# EAGLE board STMsch (EAGLE 9.5.2)
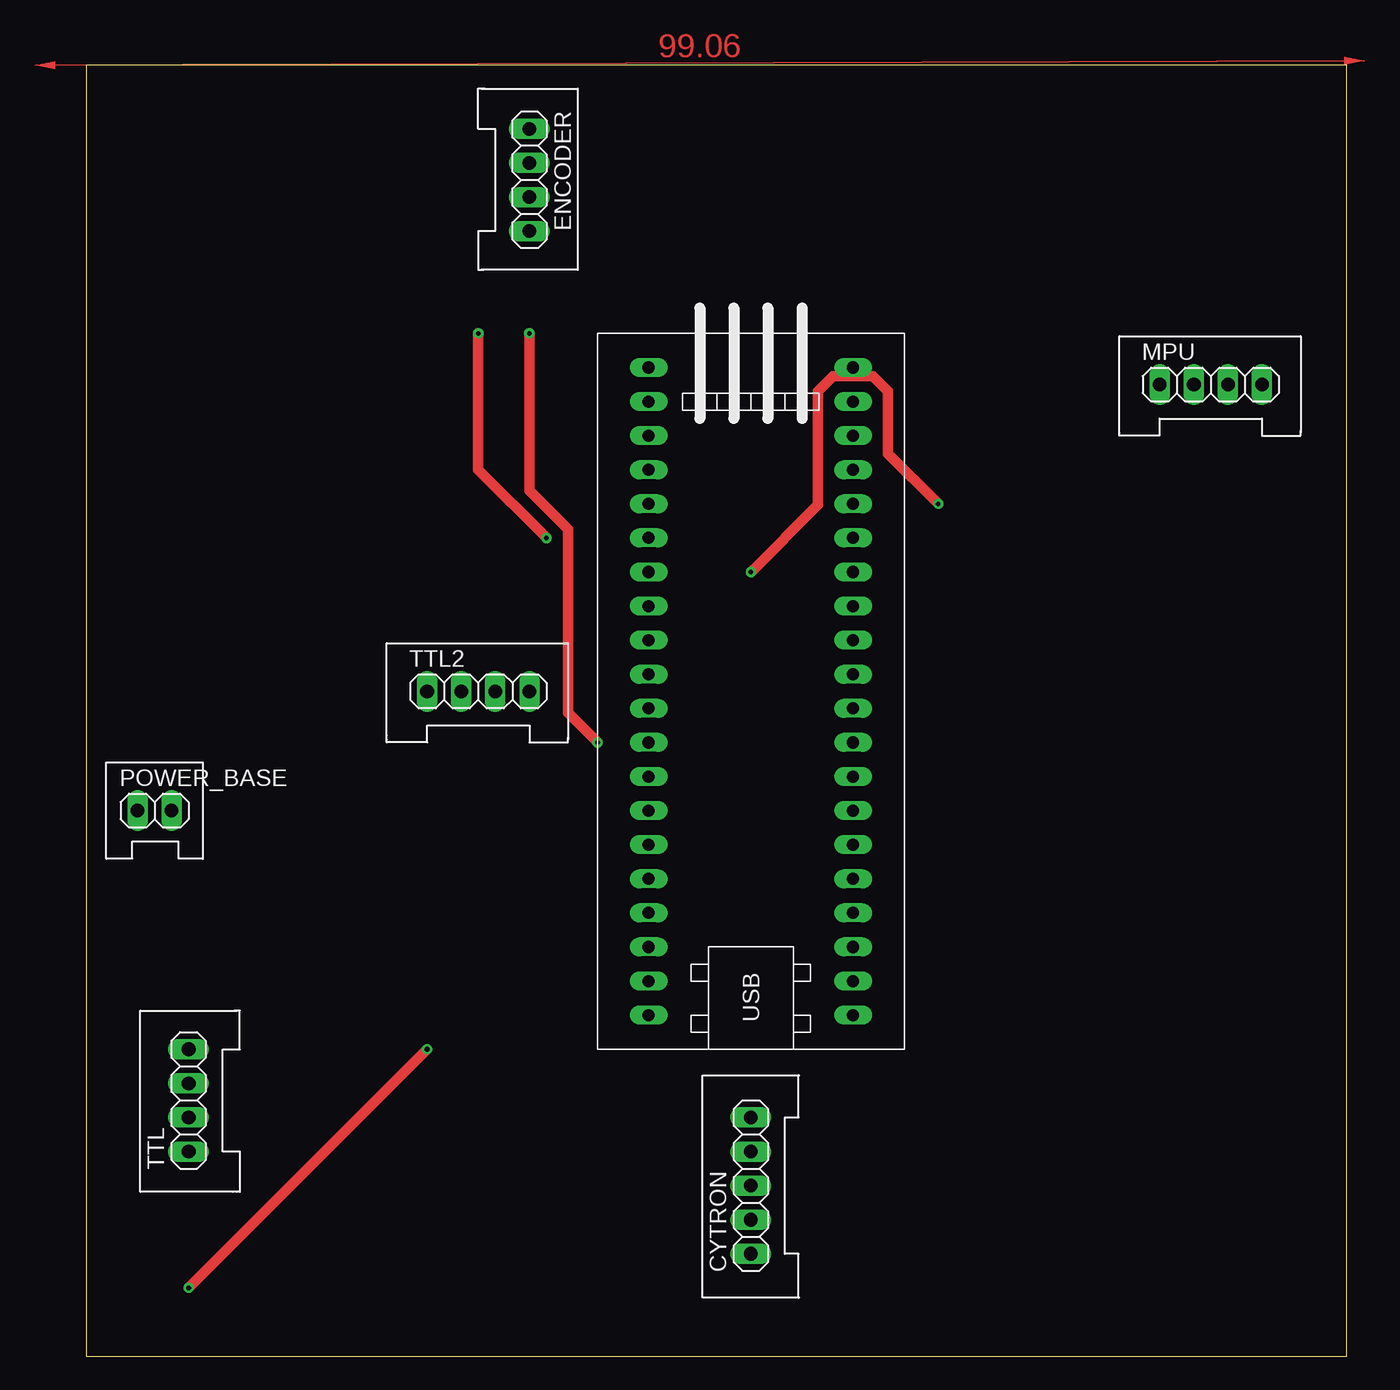
[diagram p0: board, top side]
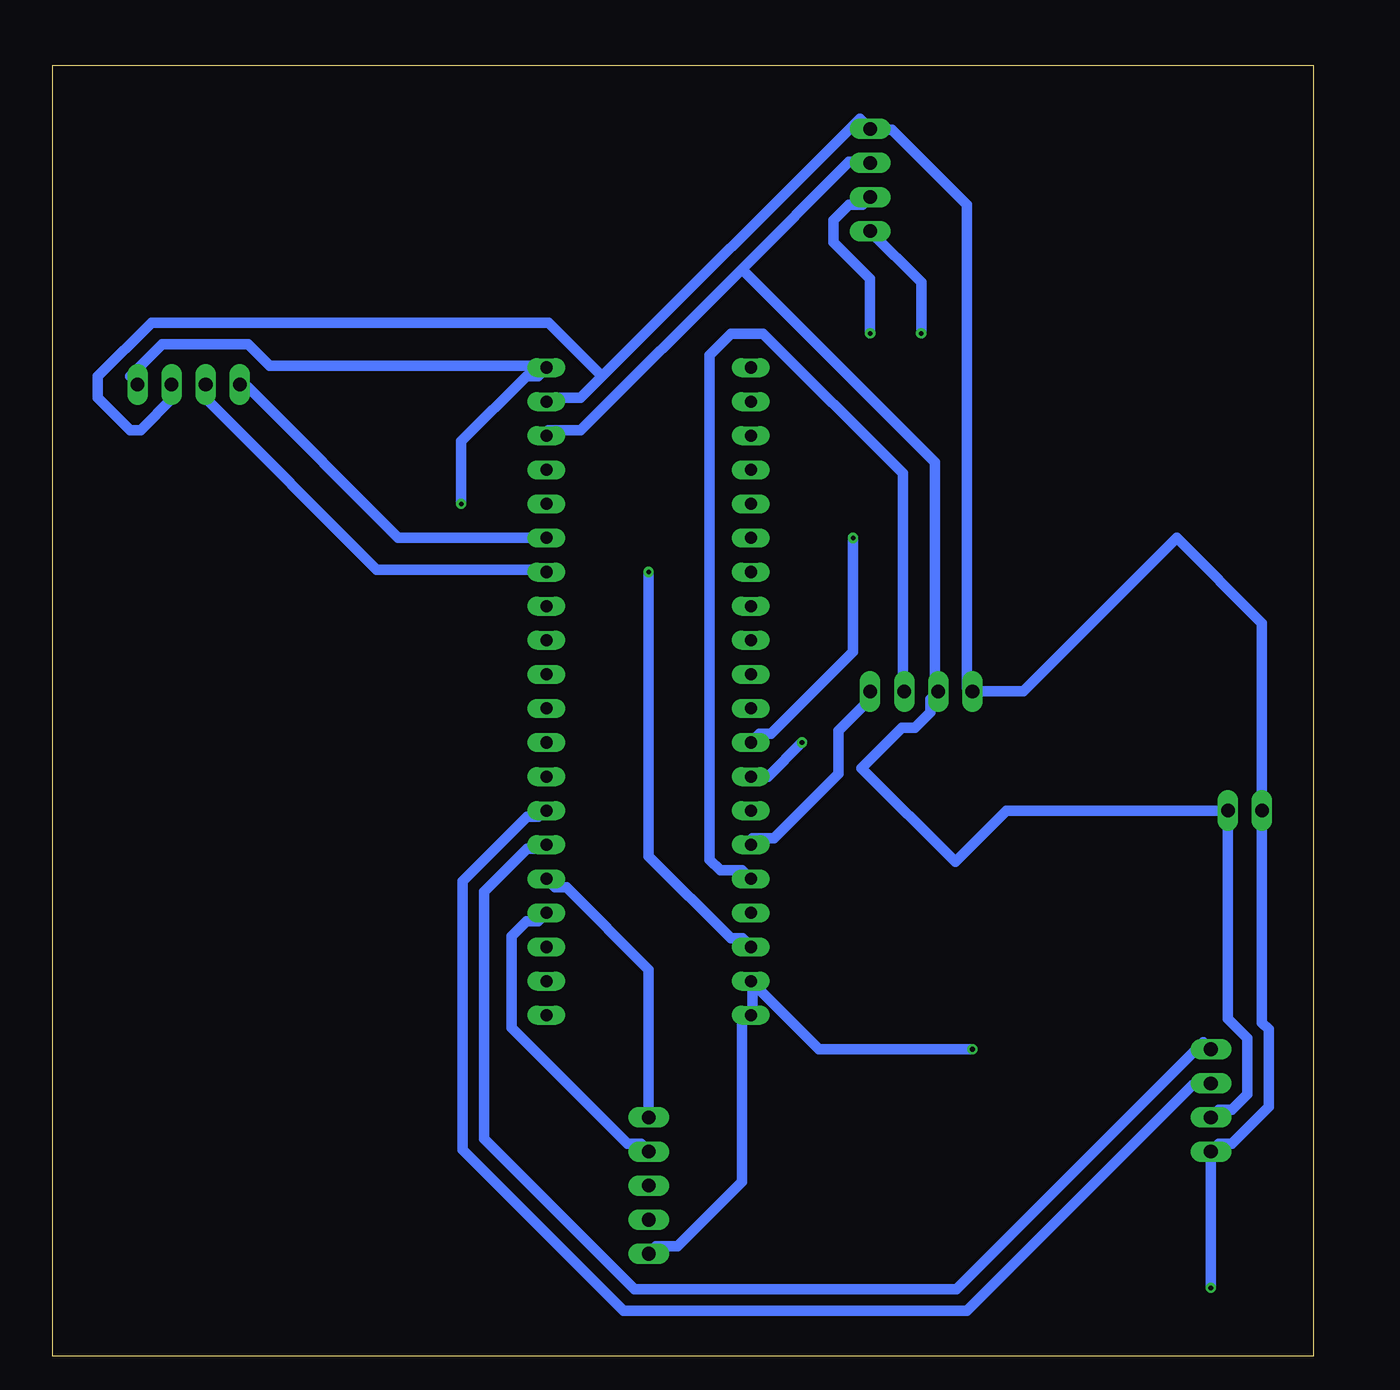
[diagram p1: board, bottom side, seen from below]

Size 93.96 x 96.19 mm. Coordinates in mm from the lower left corner, seen from the top.
Outline: 0,0 93.96,0 93.96,96.19 0,96.19 0,0
Copper layers (1*16): Top 0.035mm / dielectric 1.5mm / Bottom 0.035mm
Design rules "default *": minimum track width 0.8mm, minimum drill 0.35mm, track to track 0.8mm, track to pad 0.8mm, pad to pad 0.8mm, via to via 0.8mm, smd to smd 6mil, copper to edge 0.8mm, drill to drill 0.8mm, minimum pad ring 10mil, minimum via ring 8mil, stop-mask expansion 4mil, vias tented up to drill 0mil, thermal gap 10mil

## Footprints (pad centres in the part's own frame; a part is rotated, then mirrored left to right if it is on the bottom)
1X05_DATA = drill 1.016 long: 1 -5.08,0; 2 -2.54,0; 3 0,0; 4 2.54,0; 5 5.08,0
1X04_DATA = drill 1.016 long: 1 -3.81,0; 2 -1.27,0; 3 1.27,0; 4 3.81,0
1X02_DATA = drill 1.016 long: 1 -1.27,0; 2 1.27,0
STM32F103C8T6-MODULE = drill 0.9 long: 3.3V_1 25.4,-7.62; 3.3V_2 -17.78,7.62; 5V 20.32,-7.62; GND_1 22.86,-7.62; GND_2 -20.32,7.62; GND_3 -22.86,7.62; PA_0 15.24,7.62; PA_1 12.7,7.62; PA_2 10.16,7.62; PA_3 7.62,7.62; PA_4 5.08,7.62; PA_5 2.54,7.62; PA_6 0,7.62; PA_7 -2.54,7.62; PA_8 -12.7,-7.62; PA_9 -10.16,-7.62; PA_10 -7.62,-7.62; PA_11 -5.08,-7.62; PA_12 -2.54,-7.62; PA_15 0,-7.62; PB_0 -5.08,7.62; PB_1 -7.62,7.62; PB_3 2.54,-7.62; PB_4 5.08,-7.62; PB_5 7.62,-7.62; PB_6 10.16,-7.62; PB_7 12.7,-7.62; PB_8 15.24,-7.62; PB_9 17.78,-7.62; PB_10 -10.16,7.62; PB_11 -12.7,7.62; PB_12 -22.86,-7.62; PB_13 -20.32,-7.62; PB_14 -17.78,-7.62; PB_15 -15.24,-7.62; PC_13 22.86,7.62; PC_14 20.32,7.62; PC_15 17.78,7.62; RESET -15.24,7.62; VB 25.4,7.62

## Placement (x,y rotation side)
CYTRON  [1X05_DATA]  49.53,12.7 90 top
ENCODER  [1X04_DATA]  33.02,87.63 270 top
MPU  [1X04_DATA]  83.82,72.39 0 top
POWER_BASE  [1X02_DATA]  5.08,40.64 0 top
TTL  [1X04_DATA]  7.62,19.05 90 top
TTL2  [1X04_DATA]  29.21,49.53 0 top
U$1  STM32F103C8T6-MODULE  [STM32F103C8T6-MODULE]  49.53,48.26 90 top

## Library data of the parts
CYTRON ENCODER MPU POWER_BASE TTL TTL2 U$1 = MIA_LIBRARY-2-2-2

## Nets
3.3V: MPU.4 U$1.3.3V_1 U$1.3.3V_2
5V: ENCODER.2 POWER_BASE.2 TTL2.2 TTL.2 U$1.5V
GND: CYTRON.1 ENCODER.1 MPU.3 POWER_BASE.1 TTL2.1 TTL.1 U$1.GND_1 U$1.GND_2 U$1.GND_3
PA_0: U$1.PA_0
PA_1: U$1.PA_1
PA_2: U$1.PA_2
PA_3: U$1.PA_3
PA_4: U$1.PA_4
PA_5: U$1.PA_5
PA_6: U$1.PA_6
PA_7: ENCODER.4 U$1.PA_7
PA_8: CYTRON.5 U$1.PA_8
PA_9: TTL.4 U$1.PA_9
PA_10: TTL.3 U$1.PA_10
PA_11: U$1.PA_11
PA_12: U$1.PA_12
PA_15: U$1.PA_15
PB_0: ENCODER.3 U$1.PB_0
PB_1: U$1.PB_1
PB_3: U$1.PB_3
PB_4: U$1.PB_4
PB_5: U$1.PB_5
PB_6: MPU.2 U$1.PB_6
PB_7: MPU.1 U$1.PB_7
PB_8: U$1.PB_8
PB_9: U$1.PB_9
PB_10: TTL2.4 U$1.PB_10
PB_11: TTL2.3 U$1.PB_11
PB_12: U$1.PB_12
PB_13: U$1.PB_13
PB_14: U$1.PB_14
PB_15: CYTRON.4 U$1.PB_15
PC_13: U$1.PC_13
PC_14: U$1.PC_14
PC_15: U$1.PC_15
RESET: U$1.RESET
VB: U$1.VB

## Tracks (layer width: path | path; a pad name or v marks a point on that pad's centre or on a via)
3.3V  (via drill 0.35)
  Top 0.8: v49.53,58.42 54.54,63.43 54.54,71.91 55.66,73.02 58.64,73.02 59.76,71.91 59.76,67.24 v63.5,63.5
  Bottom 0.8: MPU.4 88.19,72.99 85.79,75.39 79.39,75.39 77.79,73.79 57.79,73.79 U$1.3.3V_1 57.79,73.02 58.64,73.02 63.5,68.17 v63.5,63.5 | U$1.3.3V_2 42.55,31.12 43.4,31.12 49.53,37.24 v49.53,58.42
5V
  Bottom 0.8: TTL.2 7.04,18.36 6.04,18.36 4.9,19.51 4.9,23.67 6.35,25.13 POWER_BASE.2 22.86,40.64 26.67,36.83 33.66,43.81 30.66,46.81 29.67,46.81 28.52,47.95 28.52,48.95 TTL2.2 28.19,49.79 28.19,66.59 42.59,80.99 | 42.59,80.99 34.59,88.99 33.79,88.99 ENCODER.2 | 42.59,80.99 54.59,68.99 56.99,68.99 U$1.5V
GND  (via drill 0.35)
  Top 0.8: v25.4,22.86 v7.62,5.08
  Bottom 0.8: 52.99,72.99 33.79,92.19 ENCODER.1 32.99,91.39 31.39,91.39 25.79,85.79 25.79,49.79 TTL2.1 21.59,49.53 10.16,60.96 3.81,54.61 POWER_BASE.1 3.81,24.85 3.3,24.34 3.3,18.57 6.04,15.82 7.04,15.82 TTL.1 v7.62,5.08 | 52.99,72.99 54.59,71.39 56.99,71.39 U$1.GND_1 | 52.99,72.99 56.99,76.99 86.59,76.99 90.59,72.99 90.59,71.39 88.19,68.99 87.39,68.99 84.99,71.39 84.99,72.19 MPU.3 | CYTRON.1 48.99,8.19 47.39,8.19 42.59,12.99 42.59,24.99 U$1.GND_3 41.79,25.79 41.79,27.39 U$1.GND_2 36.83,22.86 v25.4,22.86
PA_7  (via drill 0.35)
  Top 0.8: v34.29,60.96 29.21,66.04 v29.21,76.2
  Bottom 0.8: U$1.PA_7 41.27,46.36 40.42,46.36 34.29,52.48 v34.29,60.96 | ENCODER.4 29.21,80.01 v29.21,76.2
PA_8
  Bottom 0.8: U$1.PA_8 56.51,34.92 55.66,34.92 49.53,28.8 CYTRON.5
PA_9
  Bottom 0.8: U$1.PA_9 57.79,37.79 58.59,37.79 61.79,34.59 61.79,16.19 50.59,4.99 26.59,4.99 8.19,23.39 TTL.4
PA_10
  Bottom 0.8: U$1.PA_10 57.79,40.19 58.59,40.19 63.39,35.39 63.39,15.39 51.39,3.39 25.79,3.39 8.99,20.19 8.19,20.19 TTL.3
PB_0  (via drill 0.35)
  Top 0.8: v33.02,76.2 33.02,64.49 35.89,61.62 35.89,47.93 v38.1,45.72
  Bottom 0.8: U$1.PB_0 40.64,43.18 v38.1,45.72 | ENCODER.3 33.6,85.78 34.59,85.78 35.74,84.63 35.74,83.01 33.02,80.28 v33.02,76.2
PB_6
  Bottom 0.8: U$1.PB_6 57.79,58.59 69.79,58.59 82.59,71.39 82.59,72.19 MPU.2
PB_7
  Bottom 0.8: U$1.PB_7 57.79,60.99 68.19,60.99 79.39,72.19 MPU.1
PB_10
  Bottom 0.8: U$1.PB_10 41.79,38.59 40.19,38.59 35.39,43.39 35.39,46.59 32.99,48.99 TTL2.4
PB_11
  Bottom 0.8: U$1.PB_11 42.59,36.19 44.19,36.19 44.99,36.99 44.99,74.59 43.39,76.19 40.99,76.19 30.59,65.79 30.59,49.79 TTL2.3
PB_15
  Bottom 0.8: CYTRON.4 50.11,15.82 51.1,15.82 59.76,24.47 59.76,31.27 58.64,32.38 57.79,32.38 U$1.PB_15
(copper drawn outside any net)
  shapes: Top area x1